# Altium PCB PCB1.PcbDoc
Units mil, origin at the board's own origin, x right, y up, seen from the top; angles counter-clockwise.
Board outline 3145 x 1965 mil, 2 copper layers (Top Layer, Bottom Layer), stack 61.855 mil thick; 18 components, 41 nets, 165 pads, 16 vias.
Unrouted connection lines stored in the file: 1.
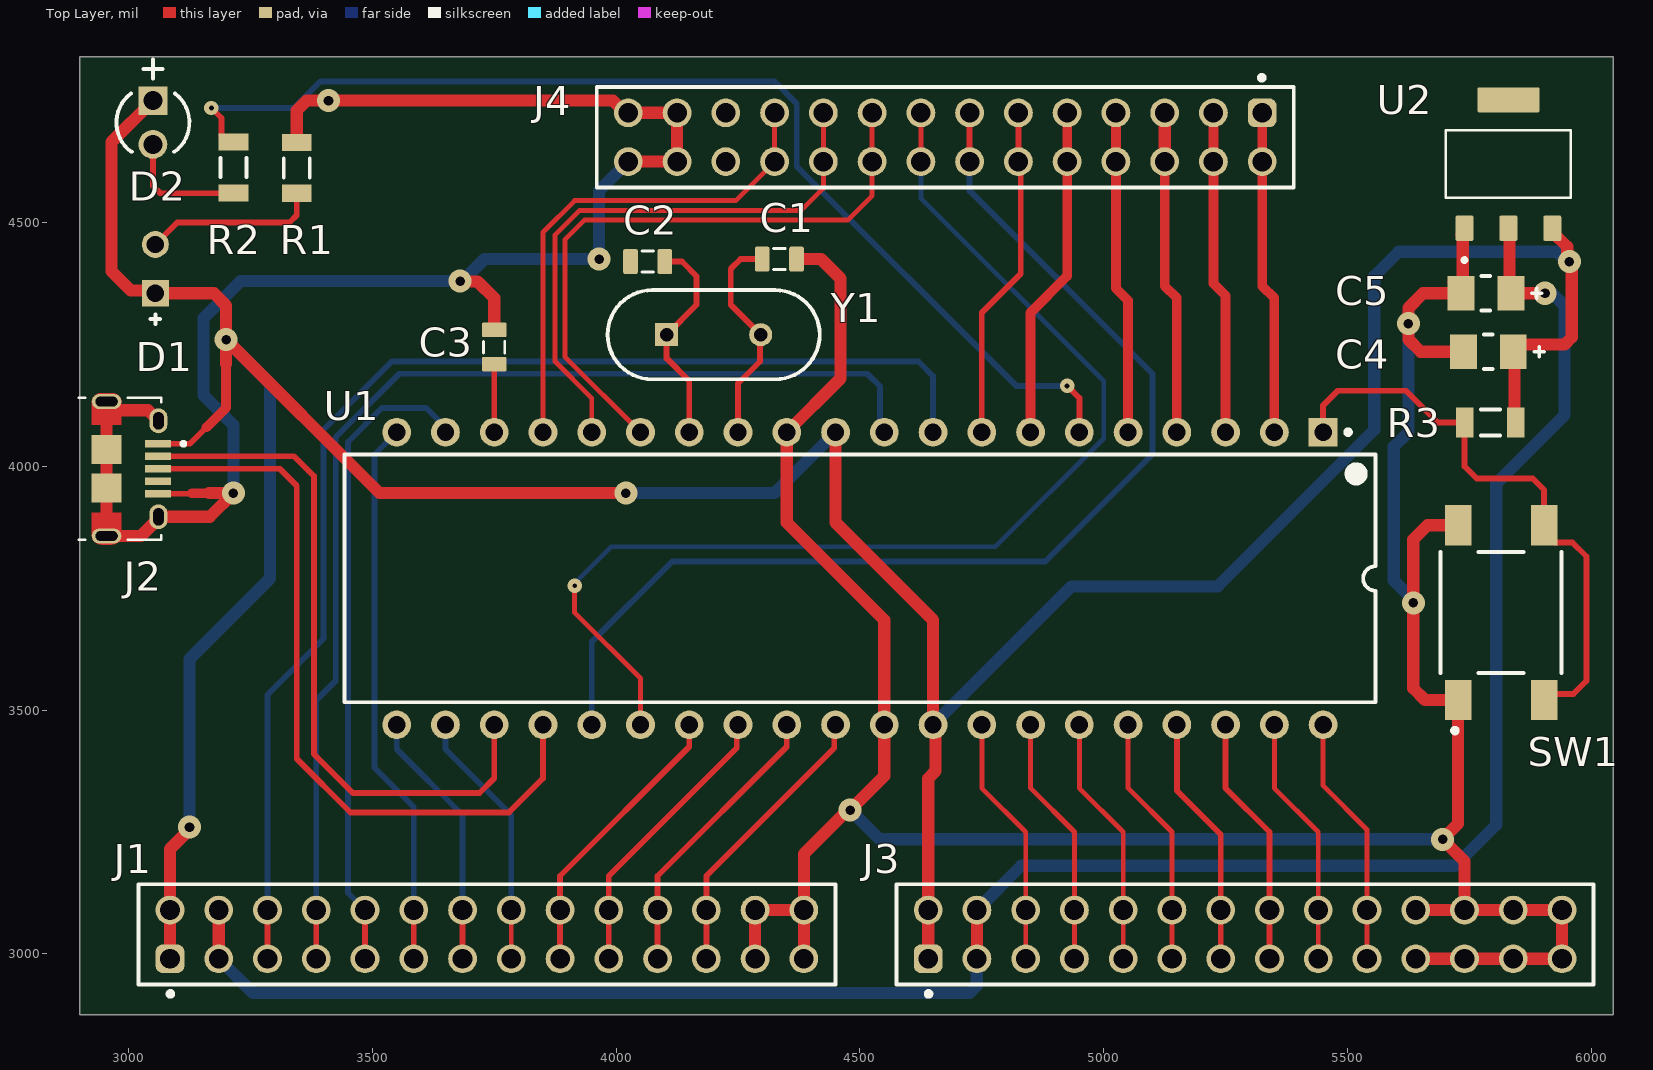
[diagram p0: Top Layer view]
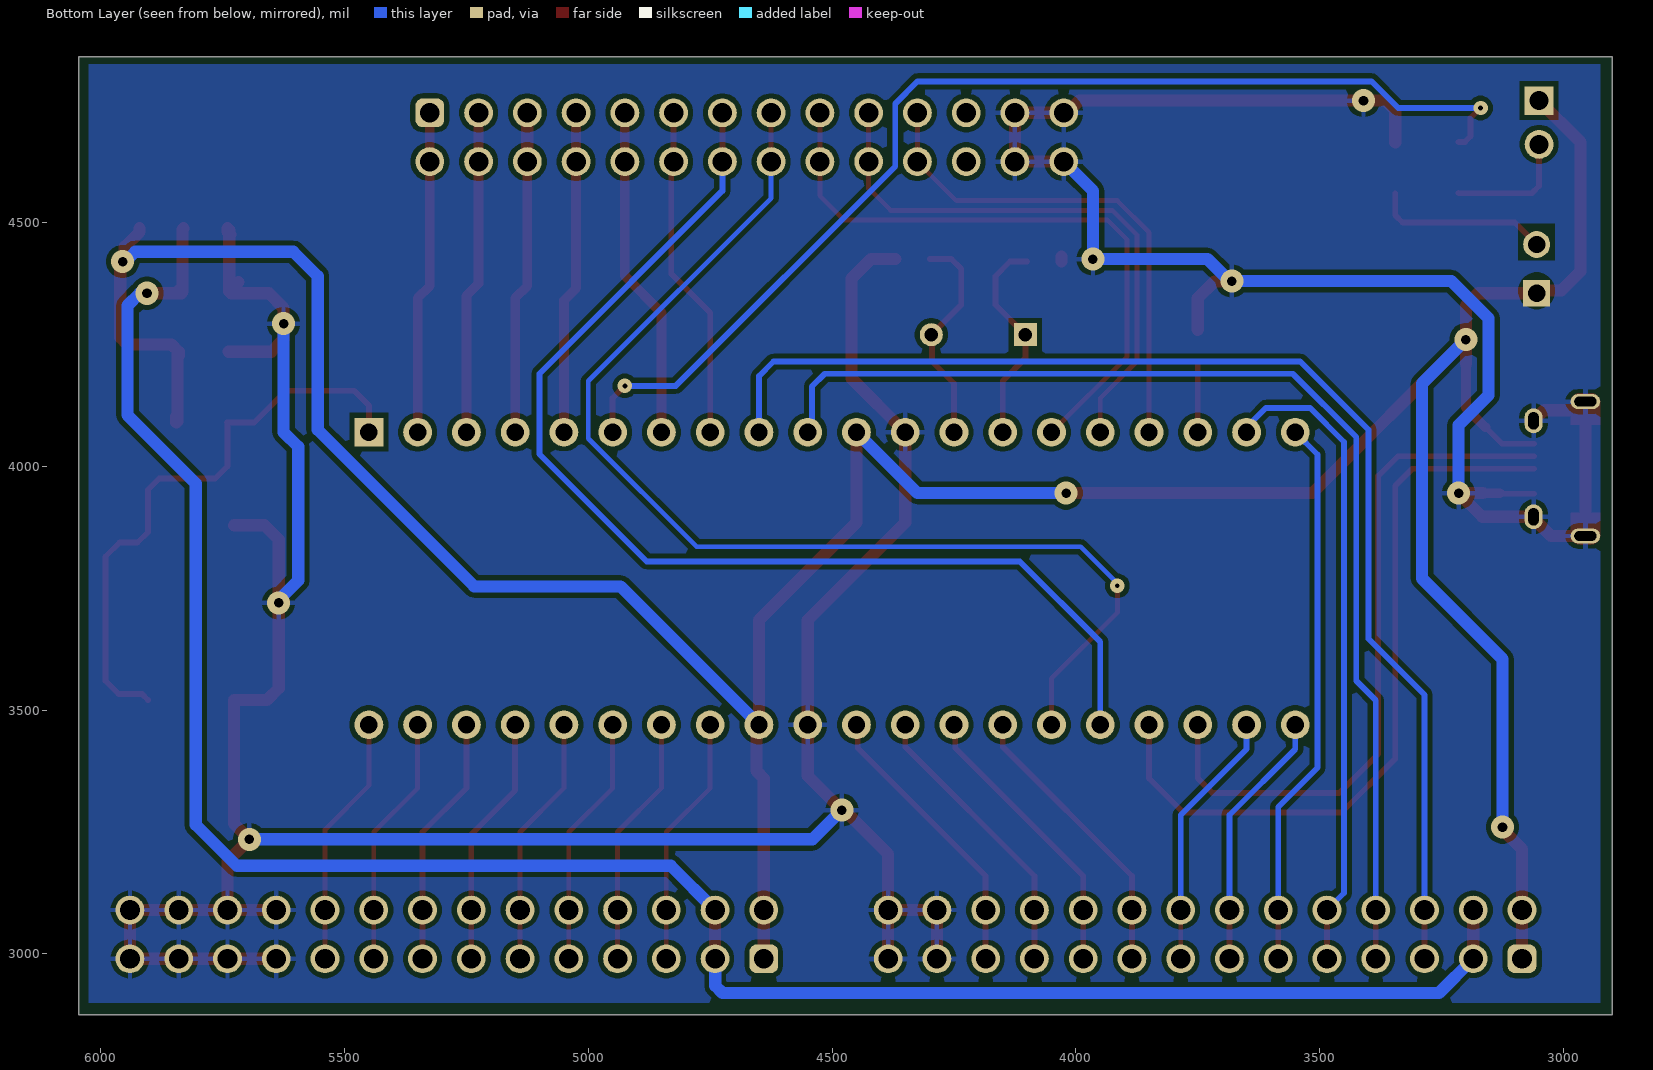
[diagram p1: Bottom Layer view, seen from below]
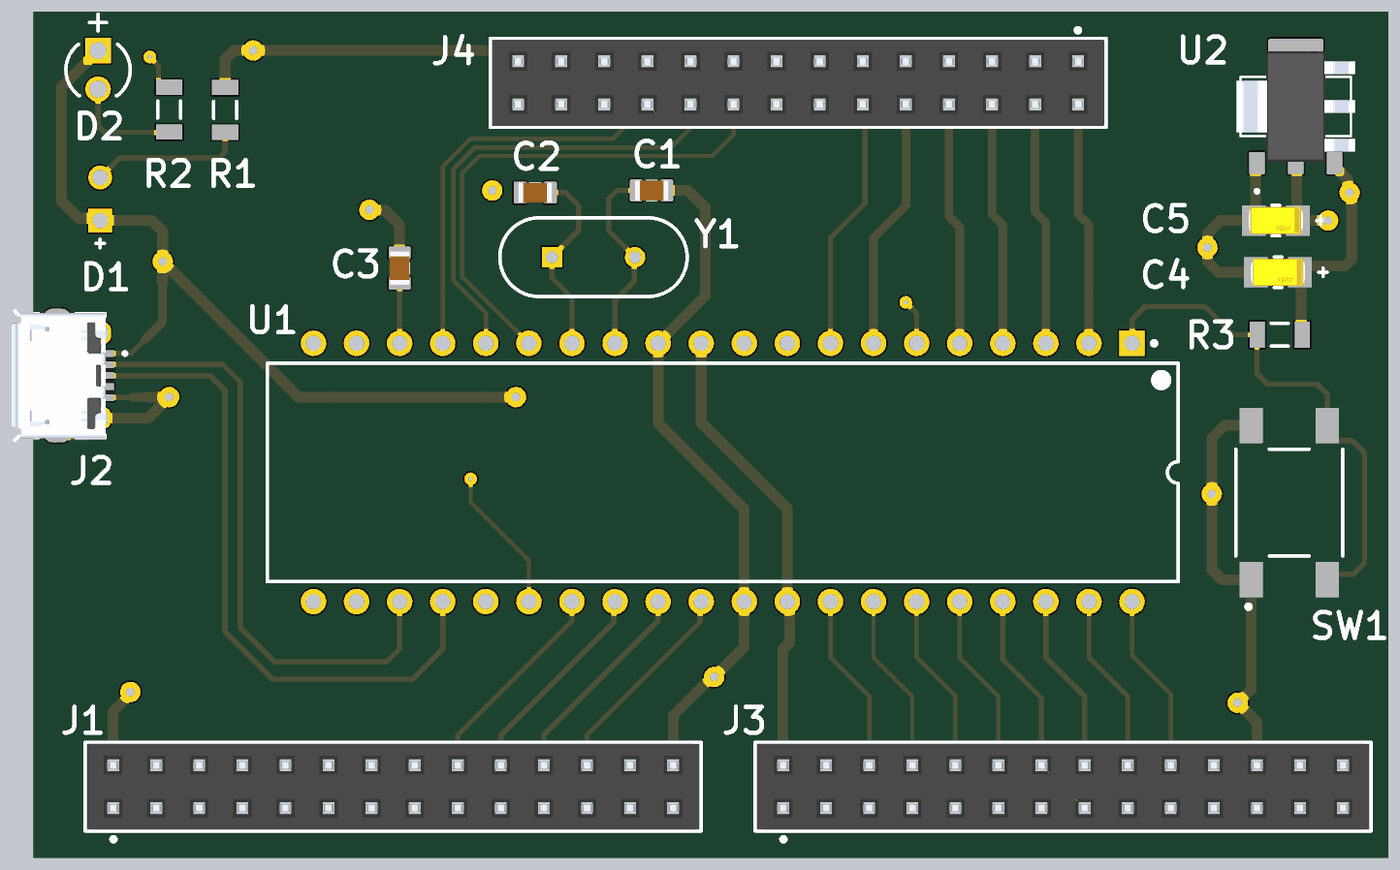
[diagram p2: 3D render of the assembled board from above, using the file's embedded part models]

## Layer stack, top to bottom
Top Solder: solder mask 0.4, Solder Resist, Dk 3.5
Top Layer: signal copper 1.4
Dielectric 1: core 59.0551, FR-4, Dk 4.8
Bottom Layer: signal copper 1.4
Bottom Solder: solder mask 0.4, Solder Resist, Dk 3.5

## Board outline
2900,2875 2900,4840 6045,4840 6045,2875

## Design rules (kind name [scope] priority, off if disabled: settings)
Clearance [All] p1: gap=10 ignorepadtopadclearanceinfootprint=FALSE
PolygonConnect [All] p1: connectstyle=Relief reliefconductorwidth=10 reliefentries=4 polygonreliefangle="90 Angle" airgapwidth=10
RoutingVias [All] p1: holewidth=28 width=50 viastyle="Through Hole" minholewidth=28 minwidth=50 maxholewidth=28 maxwidth=50
SolderMaskExpansion [All] p1: expansion=4 istentingtop=FALSE
SupplyNets "Schematic Supply Nets_2" [InNet('+3V3')] p1: voltage=0.000
SupplyNets "Schematic Supply Nets_1" [InNet('+5V/USB')] p2: voltage=0.000
SupplyNets "Schematic Supply Nets" [InNet('GND')] p3: voltage=0.000
Width [All] p1: maxlimit=39.37 minlimit=10 preferedwidth=10
30 further rules are at their usual default settings.

## Classes and differential pairs
component class Sheet1: C1 C2 C3 C4 C5 D1 D2 J2 J3 R1 R2 R3 SW1 U1 U2 Y1

## Components (designator, comment, footprint, x,y, rotation, side; value= is the part's Value field where it differs from the comment)
C1 "Capacitor 47µF +/-40% 6.3V 0805" CAPC0805(2012)145_L 4334.96,4425 r0 top value=22pF
C2 "Capacitor 47µF +/-40% 6.3V 0805" CAPC0805(2012)145_L 4064.57,4420 r180 top value=22pF
C3 "Capacitor 47µF +/-40% 6.3V 0805" CAPC0805(2012)145_L 3750,4244.57 r270 top value=220nF
C4 "22uF" FP-TAJA-MFG 5788.82,4235 r0 top
C5 "22uF" FP-TAJA-MFG 5783.82,4355 r0 top
D1 "LTL-1CHG" LTST-LTL-1CHG-2 3055,4405 r90 top (schematic designator DS1)
D2 "304090041" LED-2P-2.28-3MM_A 3050,4705.12 r270 top (schematic designator DS2)
J1 "61302821821" 61302821821 5290,3040 r0 top
J2 "10118194-0001LF" AMPHENOL_10118194-0001LF 2955,3995 r270 top
J3 "61302821821" 61302821821 3735,3040 r0 top
J4 "61302821821" 61302821821 4675,4675 r180 top
R1 "470R" RESC3216X70X50LL05T20 3345,4612.17 r270 top
R2 "470R" RESC3216X70X50LL05T20 3215,4612.83 r270 top
R3 "10k" RESC3216X70X50LL05T20 5792.83,4090 r0 top
SW1 "4-1437565-1" FP-4-1437565-1-MFG 5815,3700 r90 top
U1 "PIC18F4550-I/P" PDIP600-P40 4500,3770 r270 top
U2 "AMS1117-3.3" SOT229P700X180-4N 5830,4620 r90 top
Y1 "HC-49S 20 MHZ" JPY-HC-49US 4200,4270 r0 top

## Footprints (in the part's own frame and the unit in brackets; to place one, negate y for a bottom-side part, rotate by r counter-clockwise, add the part's x,y. Pads: shape width x height; smd on the part's side, far side on the other; paste and mask are expansions set on the pad)
61302821821 [mm] "Socket Header, Pitch 2.54 mm, THT, Vertical, dual row, 28p"
  rrect50% 1.5x1.5 hole 1.02: 1(-16.51,-1.27)
  round 1.5 hole 1.02: 2(-16.51,1.27) 3(-13.97,-1.27) 4(-13.97,1.27) 5(-11.43,-1.27) 6(-11.43,1.27) 7(-8.89,-1.27) 8(-8.89,1.27) 9(-6.35,-1.27) 10(-6.35,1.27) 11(-3.81,-1.27) 12(-3.81,1.27) 13(-1.27,-1.27) 14(-1.27,1.27) 15(1.27,-1.27) 16(1.27,1.27) 17(3.81,-1.27) 18(3.81,1.27) 19(6.35,-1.27) 20(6.35,1.27) 21(8.89,-1.27) 22(8.89,1.27) 23(11.43,-1.27) 24(11.43,1.27) 25(13.97,-1.27) 26(13.97,1.27) 27(16.51,-1.27) 28(16.51,1.27)
  silkscreen extent -18.16,-3.22 18.16,2.62, body extent -18.03,-2.54 18.03,2.54, height 8.45
AMPHENOL_10118194-0001LF [mm]
  rect 0.4x1.35 smd: 1(-1.3,2.675) 2(-0.65,2.675) 3(0,2.675) 4(0.65,2.675) 5(1.3,2.675)
  oval 0.775x1.55 hole 0.5 slot 1.15 at 90 deg mask+0: SH1(-3.5,0) SH4(3.5,0)
  rect 1.5x1.55 smd: SH2(1,0) SH3(-1,0)
  oval 1.3x0.95 hole 0.55 slot 0.9 at 0 deg: SH5(-2.5,2.7) SH6(2.5,2.7)
  Top Layer region: 3.471,0.774 3.497,0.772 3.523,0.769 3.549,0.764 3.574,0.758 3.6,0.751 3.624,0.742 3.648,0.732 3.672,0.721 3.695,0.708 3.717,0.694 3.739,0.68 3.76,0.664 3.78,0.647 3.799,0.629 3.817,0.61 3.834,0.59 3.85,0.569 3.864,0.547 3.878,0.525 3.891,0.502 3.902,0.478 3.912,0.454 3.921,0.43 3.928,0.404 3.934,0.379 3.939,0.353 3.942,0.327 3.944,0.301 3.945,0.275 3.945,-0.275 3.944,-0.301 3.942,-0.327 3.939,-0.353 3.934,-0.379 3.928,-0.404 3.921,-0.43 3.912,-0.454 3.902,-0.478 3.891,-0.502 3.878,-0.525 3.864,-0.547 3.85,-0.569 3.834,-0.59 3.817,-0.61 3.799,-0.629 3.78,-0.647 3.76,-0.664 3.739,-0.68 3.717,-0.694 3.695,-0.708 3.672,-0.721 3.648,-0.732 3.624,-0.742 3.6,-0.751 3.574,-0.758 3.549,-0.764 3.523,-0.769 3.497,-0.772 3.471,-0.774 3.445,-0.775 2.3,-0.775 2.3,0.775 3.445,0.775
  Top Layer region: -2.3,-0.775 -3.445,-0.775 -3.471,-0.774 -3.497,-0.772 -3.523,-0.769 -3.549,-0.764 -3.574,-0.758 -3.6,-0.751 -3.624,-0.742 -3.648,-0.732 -3.672,-0.721 -3.695,-0.708 -3.717,-0.694 -3.739,-0.68 -3.76,-0.664 -3.78,-0.647 -3.799,-0.629 -3.817,-0.61 -3.834,-0.59 -3.85,-0.569 -3.864,-0.547 -3.878,-0.525 -3.891,-0.502 -3.902,-0.478 -3.912,-0.454 -3.921,-0.43 -3.928,-0.404 -3.934,-0.379 -3.939,-0.353 -3.942,-0.327 -3.944,-0.301 -3.945,-0.275 -3.945,0.275 -3.944,0.301 -3.942,0.327 -3.939,0.353 -3.934,0.379 -3.928,0.404 -3.921,0.43 -3.912,0.454 -3.902,0.478 -3.891,0.502 -3.878,0.525 -3.864,0.547 -3.85,0.569 -3.834,0.59 -3.817,0.61 -3.799,0.629 -3.78,0.647 -3.76,0.664 -3.739,0.68 -3.717,0.694 -3.695,0.708 -3.672,0.721 -3.648,0.732 -3.624,0.742 -3.6,0.751 -3.574,0.758 -3.549,0.764 -3.523,0.769 -3.497,0.772 -3.471,0.774 -3.445,0.775 -2.3,0.775
  silkscreen extent -3.7,-1.45 3.7,4.1, body extent -4.02,-2.68 4.02,2.85, height 2.67
CAPC0805(2012)145_L [mm] "Chip Capacitor, Body 2.0x1.2mm, Height 1.45mm, IPC High Density"
  rrect25% 0.76x1.3 smd: 1(-0.9,0) 2(0.89,0)
  silkscreen extent -0.3,-0.55 0.3,0.55, body extent -1,-0.6 1,0.6, height 1.45
FP-4-1437565-1-MFG [mm]
  rect 2.1x1.38 smd paste+0 mask+0: 1(-4.55,2.24) 2(4.55,2.24) 3(-4.55,-2.24) 4(4.55,-2.24)
  silkscreen extent -6.27,-3.15 3.15,3.15
FP-TAJA-MFG [mm]
  rect 1.4x1.8 smd paste+0 mask+0: 1(-1.3,0) 2(1.3,0)
  silkscreen extent -0.23,-0.9 2.9,0.9, body extent -2.1,-1 2.1,1, height 0.25
JPY-HC-49US [mm] "THD, 2-Leads, Body 11.05x4.65mm, Pitch 4.9mm"
  rect 1.2x1.2 hole 0.7: 1(-2.45,0)
  round 1.2 hole 0.7: 2(2.45,0)
  silkscreen extent -5.53,-2.32 5.53,2.32, body extent -5.53,-2.33 5.52,2.32, height 3.5
LED-2P-2.28-3MM_A [mm] "LED, 2-Leads, Dia 3mm, Pitch 2.28mm"
  rect 1.5x1.5 hole 1: 1(-1.14,0)
  round 1.5 hole 1: 2(1.14,0)
  silkscreen extent -3.29,-1.9 1.52,1.9, body extent -1.9,-1.91 1.52,1.91, height 5.3
LTST-LTL-1CHG-2 [mm] "TH, 2-Leads, Dia 3.8mm"
  rect 1.4x1.4 hole 0.9: 1(-1.27,0)
  round 1.4 hole 0.9: 2(1.27,0)
  silkscreen extent -2.87,-0.25 -2.37,0.25, body extent -1.9,-1.9 1.9,1.9, height 6.5
PDIP600-P40 [mm] "DIP, 40-Pin, Row Spacing 15.24 mm, Pitch 2.54 mm"
  rect 1.5x1.5 hole 0.9: 1(-7.62,24.13)
  round 1.5 hole 0.9: 2(-7.62,21.59) 3(-7.62,19.05) 4(-7.62,16.51) 5(-7.62,13.97) 6(-7.62,11.43) 7(-7.62,8.89) 8(-7.62,6.35) 9(-7.62,3.81) 10(-7.62,1.27) 11(-7.62,-1.27) 12(-7.62,-3.81) 13(-7.62,-6.35) 14(-7.62,-8.89) 15(-7.62,-11.43) 16(-7.62,-13.97) 17(-7.62,-16.51) 18(-7.62,-19.05) 19(-7.62,-21.59) 20(-7.62,-24.13) 21(7.62,-24.13) 22(7.62,-21.59) 23(7.62,-19.05) 24(7.62,-16.51) 25(7.62,-13.97) 26(7.62,-11.43) 27(7.62,-8.89) 28(7.62,-6.35) 29(7.62,-3.81) 30(7.62,-1.27) 31(7.62,1.27) 32(7.62,3.81) 33(7.62,6.35) 34(7.62,8.89) 35(7.62,11.43) 36(7.62,13.97) 37(7.62,16.51) 38(7.62,19.05) 39(7.62,21.59) 40(7.62,24.13)
  silkscreen extent -7.74,-26.85 6.45,26.85, body extent -7.3,-26.85 7.3,26.85, height 6.35
RESC3216X70X50LL05T20 [mm] "Chip Resistor, 2-Leads, Body 3.20x1.60mm, IPC High Density"
  rect 0.9x1.55 smd: 1(-1.325,0) 2(1.325,0)
  silkscreen extent -0.5,-0.67 0.5,0.67, body extent -1.63,-0.82 1.62,0.82, height 0.7
SOT229P700X180-4N [mm]
  rrect15% 1.31x0.93 smd: 1(-3.345,2.29) 2(-3.345,0) 3(-3.345,-2.29)
  rrect15% 1.31x3.24 smd: 4(3.345,0)
  silkscreen extent -5.1,-3.25 1.75,3.25, body extent -3.25,-3.5 3.25,3.5, height 1.8

## Part data
C1 C2 C3: library part CMP-001-00082-4, "Chip Capacitor 0805", Case/Package=0805, Max Operating Temperature=85°C, Min Operating Temperature=-55°C, Tolerance=10%, Voltage Rating=6.3V, Mounting Technology=SMT, Pins=2
C4 C5: library part CMP-2000-07524-2, "22uF 10V  ±10% 3Ω 1206  SMD Tantalum Capacitor", Case Code (Imperial)=1206, Case Code (Metric)=3216, Dielectric Material=Tantalum, ESR (Equivalent Series Resistance)=3R, Leakage Current=2.2uA, Max Operating Temperature=125°C, Min Operating Temperature=-55°C, Package Quantity=1, Tolerance=10%, Voltage=10V, Capacitance=22uF, Case/Package=1206, Construction=Flat, Depth=1.6mm, Dissipation Factor=8%, Features="General Purpose", Height=1.6mm, Height - Seated (Max)=0.071inch, Lead Free="Lead Free", Lead Pitch=1.1mm, Length=3.2mm, Mount="Surface Mount", Number of Pins=2, Packaging="Tape and Reel", Polarity=Polar, Radiation Hardening=No, REACH SVHC="No SVHC", RoHS Compliant=Yes, Series=TAJ, Termination=SMD/SMT, Voltage Rating=10V, Voltage Rating (DC)=10V, Width=1.6mm
D1: library part CMP-007-00019-2, "LED Uni-Color Green, 100 mW, 30 mA, -55 to 100 degC, 2-Pin THD, RoHS, Bulk", Case/Package=Radial, Colour=Green, Forward Current=30mA, Forward Voltage=2.6V, Manufacturer=Lite-On, Max Operating Temperature=100°C, Min Operating Temperature=-55°C, Package Description="2-Pin Through Hole Device, Dia 3.8 mm", Package Quantity=1000, Power=100mW, Datasheet URL=http://datasheet.octopart.com/LTL-1CHG-Lite-On-datasheet-143841.pdf, Datasheet Version=Mar-00, Illumination Colour=Green, Lens Style=Dome, Luminous Intensity=12.6mcd, Manufacturer URL=http://www.us.liteon.com/, Mounting Technology=TH, Nominal Vf=2.1V, Package Reference=LTL-1CHG, Packaging=Bulk, Pins=2, RoHS Compliant=True, Viewing Angle=60degrees
D2: library part CMP-007-00007-2, "Red LED, 80 mW, 30 mA, -25 to 85 degC, 2-Pin THD", Manufacturer="Shenzhen CGX", Package Description="2-Pin Through Hole Device, Dia 3 mm, Pitch 2.28 mm", Case/Package=304090041, Datasheet URL=http://datasheet.octopart.com/304090041-Chengguangxing-datasheet-62330656.pdf, Datasheet Version=Sep-14, Manufacturer URL=http://szcgx.com/, Mounting Technology=TH, Package Reference=304090041, RoHS Compliant=Unknown
J1 J3 J4: library part CMP-1502-01360-3, Contact Resistance=20mΩ, Current Rating=3A, Operating Supply Voltage=250V, Gender=Female, Lead Pitch=2.54mm, NexarPartId=61924758, Number of Pins=28, Orientation=Vertical, RoHS=Non-Compliant
J2: "Micro USB, Input Output Connectors, B TYPE RECEPTACLE with flange", Package=None, Check_prices=https://www.snapeda.com/parts/10118194-0001LF/Amphenol+FCI/view-part/?ref=eda, MF="Amphenol ICC", MP=10118194-0001LF, SnapEDA_Link=https://www.snapeda.com/parts/10118194-0001LF/Amphenol+FCI/view-part/?ref=snap
R1 R2 R3: library part CMP-2003-00388-1, Manufacturer=Panasonic, Part Number=ERJ8ENF4700V
SW1: library part CMP-03407-000003-1, "SWITCH TACTILE SPST-NO 0.05A 24V", Contact Current Rating=50mA, Contact Resistance=100mΩ, Manufacturer="TE Connectivity", Operating Force=160gf, Package=0, Temperature="-35°C to +85°C", Temperature Range High=+85°C, Temperature Range Low=-35°C, Voltage Rating Dc=24V, Automotive=No, Category=Switch, Ciiva Ids=2672442, ComponentLink2Description=Datasheet, ComponentLink2URL=https://www.te.com/commerce/DocumentDelivery/DDEController?Action=showdoc&DocId=Customer+Drawing%7F2-1437565-7%7FV%7Fpdf%7FEnglish%7FENG_CD_2-1437565-7_V.pdf%7F4-1437565-1, Device Class L1=Electromechanical, Device Class L2=Switches, Device Class L3="Tactile Switches", Digikey Description="SWITCH TACTILE SPST-NO 0.05A 24V", Electromechanical Life=100000Cycles, Height=5.38mm, Import Ts=1521848451, Lead Free=Yes, Manufacturer Part Number=4-1437565-1, Mount="Surface Mount", Mouser Description="Switch Tactile OFF (ON) SPST Round Button Gull Wing 0.05A 12VDC 1.57N SMD Loose Piece", Octopart=https://octopart.com/fsm4jsma-te+connectivity-55488004, Release Date=1503379960, RoHS=TRUE, Standoff Height=0.05mm, Throw Configuration=SPST-NO
U1: library part CMP-0116-00114-1, "High Performance, Enhanced Flash, USB Microcontroller with nanoWatt Technology, 32K Flash, 40-Pin PDIP, Industrial Temperature Range", DatasheetVersion="revE, Aug-2008", PackageDescription="40-Lead Plastic Dual In-Line (P) - 600 mil Body [PDIP]", PackageReference=PDIP600-P40, PackageVersion="revBB, Aug-2009"
U2: "Sot223/Pkg 1-Amp 3.3-Volt Low Drop Out Voltage Regulatator", Package="SOT-223 Seeed Technology", Check_prices=https://www.snapeda.com/parts/AMS1117-3.3/Advanced+Monolithic+Systems/view-part/?ref=eda, MF="Advanced Monolithic Systems", MP=AMS1117-3.3, SnapEDA_Link=https://www.snapeda.com/parts/AMS1117-3.3/Advanced+Monolithic+Systems/view-part/?ref=snap
Y1: library part CMP-003-00005-2, "Crystal, 16 MHz, +/- 30 ppm, 18 pF, -20 to 70 degC, 2-Pin THD", Case/Package=HC-49US, Frequency=16MHz, Manufacturer="Jing peng yuan", Package Description="2-Pin Throug Hole Device, Body 11.05 x 4.65 mm, Pitch 4.9 mm", Datasheet URL=https://statics3.seeedstudio.com/images/opl/datasheet/306010014.pdf, Datasheet Version=May-15, Mounting Technology=TH, Package Reference=HC-49US, RoHS Compliant=Unknown

## Via types
v1: diameter 47.24, hole 19.68, Top Layer to Bottom Layer, 13 vias
v2: diameter 29.53, hole 9.84, Top Layer to Bottom Layer, 3 vias

## Nets (pads, with @x,y where several pads share a name; then routed paths per layer and width w, separated by ;. In a path a pad name is that pad's centre, name@x,y a point inside that pad or via, vN(x,y) a via of type N, cw(c..) or ccw(c..) an arc to the next point about the centre after c; other vN are vias at no path point)
+3V3: C5.2 J1.3 J1.4 J3.3 J3.4 U2.2 | length 4353.5
  Top Layer w25: J3.3 J3.4 ; J1.3 J1.4 ; U2.2 5832.5,4485.81 5832.5,4357.5 C5.2 ; C5.2@5840,4360 C5.2 ; v1(5905,4355) C5.2
  Bottom Layer w25: J3.3 3255,2920 4725,2920 4739.64,2934.64 4739.64,2989.64 J1.3 ; J1.4 4830.76,3180.76 5720.76,3180.76 5805,3265 5805,3965 5945,4105 5945,4330 v1@5920,4355
+5V/USB: C4.2 D1.1 D2.1 J1.1 J1.2 J2.1 J3.1 J3.2 R3.2 U1.11 U1.32 U2.3 | length 7452.2
  Top Layer w12: J2.1 3126.18,4046.18 3160,4080
  Top Layer w20: 3160,4080 3200,4120 3200,4210
  Top Layer w25: D2.1 2965,4665 2965,4400 3004.59,4360.41 3049.59,4360.41 D1.1 3175,4355 3200,4330 v1(3200,4260) ; J3.1 J3.2 3085,3215 v1@3120,3250 ; 3200,4210 v1(3200,4260) ; v1(4020,3945) 3515,3945 v1(3200,4260) ; U1.11 4450,3885 4650,3685 U1.32 4655,3465 4655,3375 4640,3360 J1.2 J1.1 ; C4.2@5840,4227.13 C4.2 ; R3.2@5845,4102.8 R3.2 5842.5,4092.5 5842.5,4232.5 C4.2 ; U2.3 5920.16,4480.83 5950.74,4450.24 5950.74,4424.26 v1(5955,4420) ; v1@5958.94,4421.06 5960,4420 5960,4264.64 5945.36,4250 5855,4250 C4.2
  Bottom Layer w25: v1(3125,3260) 3125,3605 3290,3770 3290,4170 v1(3200,4260) ; v1(4020,3945) 4325,3945 U1.11 ; U1.32 4933.83,3753.83 5233.83,3753.83 5555,4075 5555,4390 5605,4440 5929.23,4440 5949.23,4420 v1(5955,4420)
\: J3.7 J3.8 U1.10 | length 2364.9
  Top Layer w12: J3.7 J3.8
  Bottom Layer w12: J3.8 3385,3520 3425,3560 3425,4060 3555,4190 4515,4190 4541,4164 4541,4079 U1.10
ANALOG/PIN13: J4.1 J4.2 U1.2 | length 665.4
  Top Layer w20: J4.1 J4.2 5325,4370 5350,4345 U1.2
ANALOG/PIN14: J4.3 J4.4 U1.3 | length 665.4
  Top Layer w20: J4.3 J4.4 5225,4375 5250,4350 U1.3
ANALOG/PIN15: J4.5 J4.6 U1.4 | length 665.4
  Top Layer w20: J4.6 5125,4370 5150,4345 U1.4
  Top Layer w25: J4.6 J4.5
ANALOG/PIN16: J4.7 J4.8 U1.5 | length 665.4
  Top Layer w20: J4.7 J4.8 5025,4365 5050,4340 U1.5
ANALOG/PIN17: J4.9 J4.10 U1.7 | length 686.1
  Top Layer w20: U1.7 4850,4315 4925,4390 J4.9
D+: J2.3 U1.24 | length 1548.7
  Top Layer w12: J2.3 3310,3995 3345,3960 3345,3400 3455,3290 3780,3290 3850,3360 U1.24
D-: J2.2 U1.23 | length 1432.1
  Top Layer w12: J2.2 3339.41,4020.59 3380,3980 3380,3410 3460,3330 3720,3330 3750,3360 U1.23
GND: C1.2 C2.2 C3.1 C4.1 C5.1 J1.21 J1.22 J1.23 J1.24 J1.25 J1.26 J1.27 J1.28 J2.5 J2.SH1 J2.SH2 J2.SH3 J2.SH4 J2.SH5 J2.SH6 J3.25 J3.26 J3.27 J3.28 J4.25 J4.26 J4.27 J4.28 R1.1 SW1.1 SW1.2 U1.12 U1.31 U2.1 | length 9365.1
  Top Layer w12: J2.5 3128.82,3943.82 3130,3945
  Top Layer w20: 3130,3945 3165,3945
  Top Layer w25: J2.SH4 3025.46,3857.2 3061.3,3893.04 J2.SH6 3166.57,3896.57 v1(3215,3945) ; 2955,3885 J2.SH2 J2.SH3 2955,4095 ; 2965,4115 3039.72,4115 3052.04,4102.69 3055.57,4102.69 3061.3,4096.96 J2.SH5 ; 3165,3945 v1@3200,3945 ; R1.1 3345,4730 3365,4750 v1(3410,4750) 3993.33,4750 4018.33,4725 J4.25 J4.26 J4.28 J4.28@4018.48,4618.48 ; v1(3680,4380) 3680.72,4379.28 3715.72,4379.28 3750,4345 C3.1 ; C2.2 C2.2@4029.53,4430.63 ; J3.25 J3.26 J3.28 ; C1.2 4420,4425 4460,4385 4460,4180 U1.12 4350,3885 4550,3685 U1.31 4550,3365 v1(4480,3295) 4475,3295 4385,3205 J3.28 ; J3.27 J3.28 ; J1.21 J1.23 J1.25 J1.27 J1.28 J1.26 J1.24 ; J1.22 J1.24 ; C5.1@5717.58,4377.93 5732.64,4362.87 C5.1 ; SW1.2 5664.13,3879.13 5635,3850 v1(5635,3720) 5635,3545 5659.13,3520.87 SW1.1 5726.81,3266.81 v1(5695,3235) 5740,3190 J1.24 ; U2.1@5734.04,4475.02 U2.1@5736.24,4477.22 ; C4.1 5650,4235 5625,4260 v1(5625,4292.5) 5625,4325 5655,4355 C5.1 ; C5.1 5736.24,4358.6 U2.1@5736.24,4477.22 ; U2.1@5736.24,4477.22 5739.84,4480.83 U2.1 5736.24,4484.7 U2.1@5736.24,4477.22
  Bottom Layer w25: v1(3215,3945) 3215,4084.5 3153.88,4145.62 3153.88,4303.88 3230,4380 v1(3680,4380) 3684.95,4380 3729.95,4425 v1(3965,4425) 3965,4565 J4.28 ; v1(4480,3295) 4540,3235 v1(5695,3235) ; v1(5625,4292.5) 5625,4070 5595,4040 5595,3766.02 5635,3726.02 v1(5635,3720)
NetC1_1: C1.1 U1.13 Y1.2 | length 452.5
  Top Layer w12: U1.13 4250,4170 4295,4215 4295,4268.54 Y1.2 4235,4331.46 4235,4405 4255,4425 C1.1
NetC2_1: C2.1 U1.14 Y1.1 | length 442.1
  Top Layer w12: C2.1 4135,4420 4165,4390 4165,4331.46 Y1.1 4103.54,4221.46 4150,4175 U1.14
NetC3_2: C3.2 U1.18 | length 139.6
  Top Layer w12: U1.18 C3.2 C3.2@3750.04,4209.57
NetDS1_2: D1.2 R1.2 | length 364.9
  Top Layer w12: D1.2 3100,4500 3330,4500 3345,4515 R1.2 ; D1.2@3065,4455 D1.2@3070,4455
NetDS2_2: D2.2 R2.2 | length 256.7
  Top Layer w12: D2.2 3050,4575 3065,4560 3214.33,4560 R2.2
PIN0: J1.5 J1.6 U1.33 | length 517.3
  Top Layer w10: U1.33 4750,3340 4840,3250 J1.6 J1.5
PIN1: J1.7 J1.8 U1.34 | length 517.3
  Top Layer w10: U1.34 4850,3340 4940,3250 J1.8 J1.7
PIN2: J1.9 J1.10 U1.35 | length 517.3
  Top Layer w10: U1.35 4950,3340 5040,3250 J1.10 J1.9
PIN3: J1.11 J1.12 U1.36 | length 517.3
  Top Layer w10: U1.36 5050,3340 5140,3250 J1.12 J1.11
PIN4: J1.13 J1.14 U1.37 | length 517.3
  Top Layer w12: U1.37 5150,3335 5240,3245 J1.14 J1.13
PIN5: J1.15 J1.16 U1.38 | length 517.3
  Top Layer w12: U1.38 5250,3340 5340,3250 J1.16 J1.15
PIN6: J1.17 J1.18 U1.39 | length 517.3
  Top Layer w10: U1.39 5350,3340 5440,3250 J1.18 J1.17
PIN7: J1.19 J1.20 U1.40 | length 517.3
  Top Layer w10: U1.40 5450,3345 5540,3255 J1.20 J1.19
PIN8: J4.13 J4.14 U1.25 | length 2334.8
  Top Layer w12: J4.14 J4.13
  Bottom Layer w12: U1.25 3950,3640 4115,3805 4880,3805 5100,4025 5100,4190 4725,4565 J4.14
PIN9: J4.15 J4.16 U1.26 | length 2365.2
  Top Layer w10: v2(3915,3755) 3915,3700 4050,3565 U1.26 ; J4.16 J4.15
  Bottom Layer w10: v2@3920,3765 3990,3835 4777.97,3835 5000,4057.03 5000,4175 4625,4550 J4.16
PIN10: J4.17 J4.18 U1.15 | length 1296.5
  Top Layer w10: U1.15 3895,4225 3895,4465 3935,4505 4475,4505 4525,4555 J4.18 J4.17
PIN11: J4.19 J4.20 U1.16 | length 1180.4
  Top Layer w10: U1.16 3950,4140 3875,4215 3875,4475 3925,4525 4380,4525 4425,4570 J4.20 J4.19
PIN12: J4.21 J4.22 U1.17 | length 1045.1
  Top Layer w10: U1.17 3850,4480 3915,4545 4245,4545 J4.22 J4.21
PIN18: J4.11 J4.12 U1.8 | length 690.2
  Top Layer w12: U1.8 4750,4315 4830,4395 4830,4620 J4.12 J4.11
PIN19: J3.5 J3.6 U1.9 | length 2568.1
  Top Layer w12: J3.5 J3.6
  Bottom Layer w12: J3.6 3285,3531.37 3400,3646.37 3400,4075 3540,4215 4620,4215 4650,4185 U1.9
PIN21: J3.9 J3.10 U1.19 | length 1330.1
  Top Layer w12: J3.9 J3.10
  Bottom Layer w12: J3.10 3450,3125 3450,4050 3520,4120 3610,4120 3650,4080 U1.19
PIN22: J3.11 J3.12 U1.20 | length 1132.2
  Top Layer w12: J3.11 J3.12
  Bottom Layer w12: U1.20 3504.47,4024.47 3504.47,3382.02 3585,3301.49 J3.12
PIN23: J3.13 J3.14 U1.21 | length 535.9
  Top Layer w12: J3.13 J3.14
  Bottom Layer w12: U1.21 3550,3420 3685,3285 J3.14
PIN24: J3.15 J3.16 U1.22 | length 535.9
  Top Layer w10: J3.15 J3.16
  Bottom Layer w12: U1.22 3650,3420 3785,3285 J3.16
PIN25: J3.17 J3.18 U1.27 | length 589.8
  Top Layer w12: J3.17 J3.18 3885,3160 4150,3425 U1.27
PIN26: J3.19 J3.20 U1.28 | length 589.8
  Top Layer w12: J3.19 J3.20 3985,3160 4247.47,3422.47 4247.47,3467.47 U1.28
PIN27: J3.21 J3.22 U1.29 | length 589.8
  Top Layer w12: J3.21 J3.22 4085,3160 4350,3425 U1.29
PIN28: J3.23 J3.24 U1.30 | length 592
  Top Layer w12: J3.23 J3.24 4185,3160 4447.47,3422.47 U1.30@4447.47,3467.47 ; U1.30@4445.89,3465.89 U1.30@4447.47,3467.47 ; U1.30 U1.30@4447.47,3467.47
RCV: R2.1 U1.6 | length 2313.3
  Top Layer w12: v2(3170,4735) 3190.49,4714.51 3190.49,4676.72 3202.2,4665 R2.1 ; v2(4925,4165) 4950,4140 U1.6
  Bottom Layer w12: v2(3170,4735) 3338.97,4735 3393.59,4789.62 4324.76,4789.62 4370.53,4743.86 4370.53,4615.09 4820.61,4165 v2(4925,4165)
RESET: R3.1 SW1.3 SW1.4 U1.1 | length 1210.8
  Top Layer w12: U1.1 5450,4125 5480,4155 5620,4155 5685,4090 R3.1 5740,4089.33 5740,4000 5765,3975 5880,3975 5903.19,3951.81 SW1.4 5903.19,3864.96 5924.35,3843.8 5961.2,3843.8 5990,3815 5990,3560 5963.35,3533.35 5915.68,3533.35 SW1.3
pads on no net: J2.4 J4.23 J4.24 U2.4

## Polygon pours and split planes (outlines as drawn)
GND on Bottom Layer "GND_L02_P001" (solid, pour order 1): 6025,2900 6025,4825 2925,4825 2925,2900

## Silkscreen, mask and mechanical layers (free items; w line width, h text height)
Mechanical 1:
  lines w10: 2900,2875 6049.61,2875 6049.61,4843.5 2900,4843.5 2900,2875

## Text inside footprints (layer, text, board x,y; h text height)
J2: Top Assembly "PCB EDGE" at 2905.79,3827.68 h32 r270